# EAGLE board Ffrydiau_Panel (EAGLE 9.6.2)
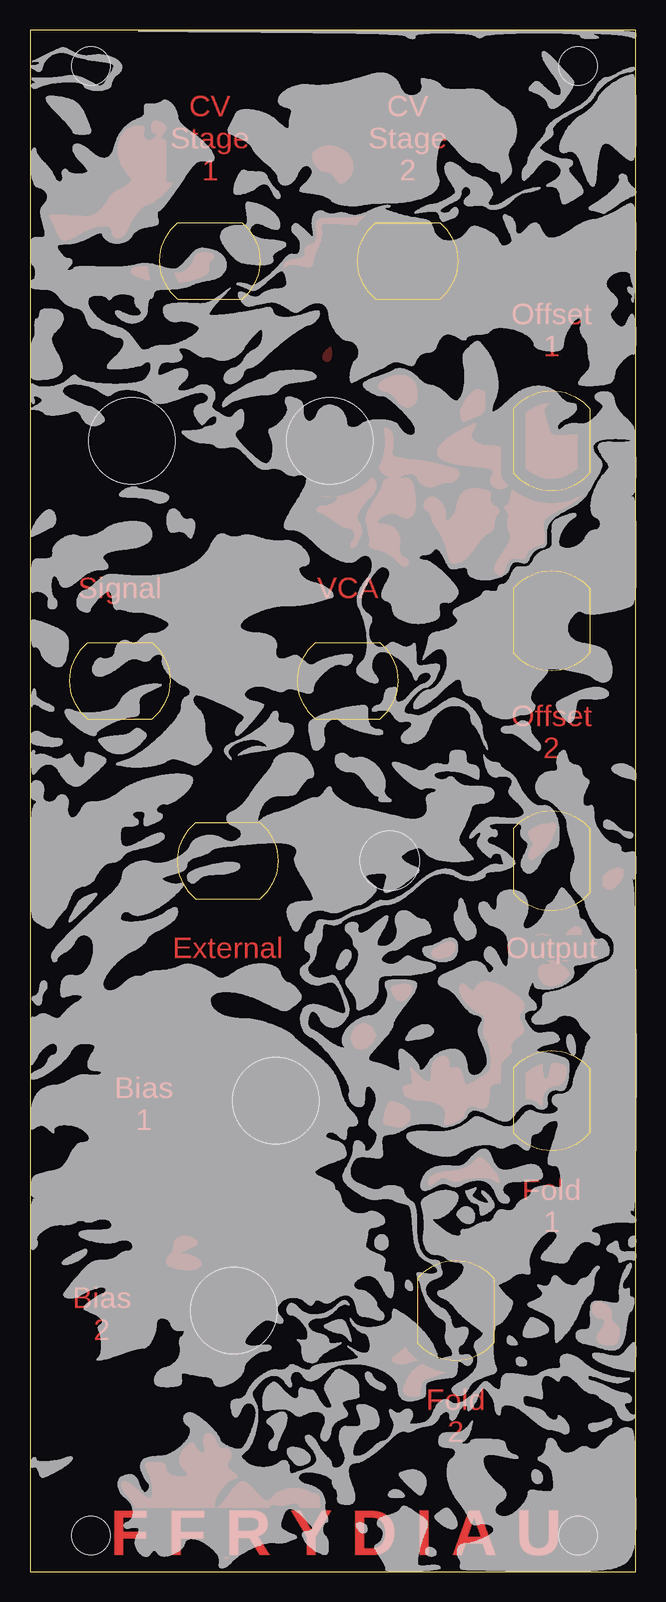
[diagram p0: board, top side]

Size 50.5 x 128.5 mm. Coordinates in mm from the lower left corner, seen from the top.
Outline: 0,0 50.5,0 50.5,128.5 0,128.5 0,0
Copper layers (1*16): Top 0.035mm / dielectric 1.5mm / Bottom 0.035mm
Design rules "default": minimum track width 6mil, minimum drill 0.35mm, track to track 6mil, track to pad 6mil, pad to pad 6mil, via to via 6mil, smd to smd 6mil, copper to edge 40mil, drill to drill 6mil, minimum pad ring 10mil, minimum via ring 8mil, stop-mask expansion 4mil, vias tented up to drill 0mil, thermal gap 10mil
Holes 3.2 mm at 5.08,3 5.08,125.5 45.72,3 45.72,125.5

## Footprints (pad centres in the part's own frame; a part is rotated, then mirrored left to right if it is on the bottom)
ALPHA9MM_POT_CUTOUT = hole 7.2: 0,0
DW1_SWITCH_CUTOUT = hole 4.95: 0,0

## Placement (x,y rotation side)
E$1  [CINCH_BANANA_CUTOUT]  15,109.25 90 top
E$2  [CINCH_BANANA_CUTOUT]  31.5,109.25 90 top
E$3  [CINCH_BANANA_CUTOUT]  43.5,94.25 0 top
E$4  [CINCH_BANANA_CUTOUT]  43.5,79.25 0 top
E$5  [CINCH_BANANA_CUTOUT]  7.5,74.25 90 top
E$6  [CINCH_BANANA_CUTOUT]  26.5,74.25 90 top
E$7  [CINCH_BANANA_CUTOUT]  16.5,59.25 90 top
E$8  [CINCH_BANANA_CUTOUT]  43.5,59.25 0 top
E$9  [CINCH_BANANA_CUTOUT]  43.5,39.25 0 top
E$10  [CINCH_BANANA_CUTOUT]  35.5,21.75 0 top
E$11  [ALPHA9MM_POT_CUTOUT]  25,94.25 0 top
E$12  [ALPHA9MM_POT_CUTOUT]  8.5,94.25 0 top
E$13  [ALPHA9MM_POT_CUTOUT]  20.5,39.25 0 top
E$14  [ALPHA9MM_POT_CUTOUT]  17,21.75 0 top
E$15  [DW1_SWITCH_CUTOUT]  30,59.25 0 top

## Library data of the parts
E$1-E$15 = ElectricNoodleBox

## Tracks (layer width: path | path; a pad name or v marks a point on that pad's centre or on a via)
S$1
  pour Top: 25.17,101.54 25.17,101.69 25.16,101.8 25.16,101.85 25.15,101.9 25.14,101.95 25.12,102 25.07,102.03 25.02,102.03 24.97,102.01 24.93,101.98 24.89,101.95 24.8,101.89 24.76,101.86 24.73,101.82 24.69,101.78 24.65,101.74 24.62,101.7 24.56,101.62 24.53,101.57 24.51,101.52 24.48,101.48 24.46,101.43 24.45,101.38 24.43,101.33 24.42,101.28 24.42,101.23 24.42,101.17 24.43,101.12 24.45,101.07 24.48,101.03 24.51,100.99 24.55,100.96 24.6,100.93 24.64,100.9 24.69,100.89 24.75,100.88 24.8,100.88 24.85,100.88 24.9,100.89 24.95,100.92 24.99,100.95 25.03,100.99 25.06,101.03 25.09,101.07 25.11,101.12 25.12,101.17 25.14,101.22 25.15,101.27 25.16,101.33 25.17,101.43
S$2
  pour Top: 26.54,116.11 26.61,116.19 26.64,116.23 26.71,116.31 26.74,116.35 26.8,116.44 26.82,116.49 26.87,116.58 26.89,116.63 26.93,116.73 26.94,116.78 26.96,116.83 26.97,116.88 26.98,116.93 26.98,116.99 26.99,117.04 26.99,117.09 26.99,117.14 26.98,117.2 26.98,117.25 26.97,117.3 26.95,117.41 26.94,117.46 26.9,117.56 26.89,117.61 26.84,117.7 26.82,117.75 26.77,117.84 26.74,117.89 26.68,117.97 26.61,118.06 26.54,118.14 26.51,118.17 26.43,118.25 26.35,118.32 26.27,118.38 26.23,118.42 26.14,118.48 26.05,118.53 25.96,118.58 25.86,118.63 25.77,118.67 25.67,118.71 25.62,118.73 25.52,118.76 25.41,118.79 25.31,118.81 25.26,118.82 25.15,118.83 25.05,118.84 25,118.84 24.89,118.84 24.78,118.83 24.68,118.82 24.57,118.8 24.52,118.79 24.42,118.76 24.37,118.75 24.27,118.71 24.17,118.67 24.13,118.65 24.03,118.6 23.94,118.54 23.86,118.48 23.77,118.42 23.69,118.35 23.66,118.31 23.62,118.27 23.6,118.22 23.58,118.17 23.56,118.12 23.55,118.07 23.54,118.02 23.54,117.97 23.54,117.91 23.54,117.86 23.55,117.81 23.56,117.76 23.58,117.71 23.59,117.66 23.61,117.61 23.65,117.51 23.7,117.41 23.75,117.32 23.81,117.24 23.88,117.15 23.95,117.08 24.03,117 24.11,116.93 24.19,116.87 24.24,116.85 24.28,116.82 24.33,116.8 24.38,116.78 24.43,116.76 24.48,116.74 24.53,116.73 24.59,116.72 24.64,116.72 24.69,116.72 24.74,116.71 24.8,116.7 24.85,116.69 24.9,116.67 24.94,116.65 24.99,116.63 25.04,116.6 25.08,116.57 25.13,116.54 25.17,116.51 25.21,116.48 25.25,116.44 25.29,116.4 25.32,116.37 25.35,116.32 25.38,116.28 25.41,116.24 25.49,116.1 25.55,116.01 25.58,115.97 25.61,115.92 25.64,115.88 25.68,115.85 25.72,115.81 25.77,115.78 25.81,115.76 25.86,115.75 25.92,115.74 25.97,115.74 26.02,115.75 26.07,115.76 26.12,115.78 26.17,115.81 26.21,115.84 26.3,115.9 26.34,115.93 26.42,116
S$3
  pour Top: 463 corners
S$4
  pour Top: 14,107.81 14.2,107.89 14.35,107.96 14.49,108.02 14.58,108.07 14.63,108.1 14.72,108.16 14.76,108.19 14.8,108.23 14.84,108.26 14.87,108.3 14.9,108.35 14.93,108.39 14.94,108.44 14.95,108.5 14.95,108.55 14.95,108.6 14.92,108.71 14.92,108.76 14.91,108.81 14.91,108.86 14.91,108.92 14.92,108.97 14.93,109.02 14.94,109.07 14.96,109.12 14.98,109.17 15.01,109.21 15.05,109.25 15.09,109.29 15.13,109.32 15.18,109.35 15.22,109.38 15.26,109.41 15.29,109.45 15.32,109.5 15.35,109.54 15.36,109.59 15.36,109.65 15.34,109.7 15.31,109.74 15.27,109.78 15.23,109.81 15.18,109.83 15.14,109.85 15.08,109.87 15.03,109.88 14.93,109.9 14.88,109.91 14.77,109.92 14.67,109.93 14.56,109.93 14.45,109.92 14.35,109.91 14.24,109.9 14.19,109.89 14.14,109.87 14.09,109.86 14.04,109.84 13.99,109.82 13.95,109.79 13.9,109.77 13.86,109.73 13.82,109.7 13.78,109.66 13.75,109.62 13.72,109.57 13.7,109.53 13.64,109.38 13.58,109.23 13.54,109.14 13.49,109.04 13.44,108.95 13.41,108.9 13.35,108.81 13.29,108.73 13.22,108.65 13.15,108.57 13.07,108.5 13.03,108.47 12.98,108.44 12.94,108.41 12.89,108.38 12.85,108.36 12.8,108.33 12.75,108.31 12.65,108.28 12.55,108.25 12.5,108.24 12.39,108.23 12.28,108.22 12.18,108.21 12.07,108.22 11.97,108.23 11.86,108.24 11.76,108.25 11.65,108.27 11.5,108.31 11.4,108.33 11.24,108.38 11.14,108.41 10.99,108.46 10.59,108.6 10.49,108.63 10.34,108.67 10.18,108.71 10.08,108.73 9.97,108.74 9.81,108.76 9.71,108.77 9.6,108.77 9.44,108.77 9.34,108.77 9.23,108.76 9.13,108.75 9.02,108.74 8.92,108.72 8.81,108.7 8.76,108.69 8.71,108.67 8.66,108.65 8.61,108.63 8.57,108.61 8.52,108.58 8.48,108.55 8.44,108.51 8.42,108.46 8.41,108.41 8.42,108.36 8.44,108.31 8.48,108.27 8.51,108.23 8.56,108.2 8.6,108.16 8.64,108.14 8.69,108.11 8.78,108.06 8.88,108.01 8.97,107.97 9.07,107.92 9.17,107.88 9.27,107.85 9.42,107.8 9.62,107.73 9.82,107.68 10.03,107.63 10.24,107.59 10.45,107.55 10.66,107.52 10.87,107.5 11.08,107.48 11.29,107.47 11.5,107.46 11.71,107.45 11.93,107.46 12.14,107.46 12.35,107.48 12.56,107.49 12.77,107.52 12.98,107.55 13.19,107.59 13.34,107.62 13.55,107.67 13.7,107.71 13.85,107.76
S$5
  pour Top: 227 corners
S$6
  pour Top: 848 corners
S$7
  pour Top: 280 corners
S$8
  pour Top: 211 corners
S$9
  pour Top: 476 corners
S$10
  pour Top: 37.09,96.23 37.23,96.29 37.33,96.33 37.42,96.38 37.52,96.43 37.61,96.48 37.65,96.51 37.69,96.54 37.73,96.58 37.77,96.61 37.81,96.65 37.84,96.69 37.87,96.74 37.9,96.79 37.92,96.83 37.94,96.88 37.95,96.93 37.96,96.99 37.98,97.09 37.99,97.2 37.99,97.35 38,97.57 37.99,97.78 37.98,97.94 37.97,98.1 37.95,98.2 37.94,98.25 37.93,98.3 37.91,98.35 37.86,98.36 37.81,98.38 37.7,98.4 37.55,98.45 37.4,98.51 37.35,98.51 37.3,98.51 37.25,98.5 37.19,98.49 37.15,98.47 37.1,98.45 37.05,98.42 37.01,98.39 36.96,98.36 36.92,98.33 36.84,98.26 36.8,98.23 36.72,98.16 36.61,98.04 36.55,97.96 36.48,97.88 36.38,97.75 36.32,97.66 36.27,97.57 36.21,97.48 36.16,97.39 36.09,97.25 36.04,97.15 36,97.05 35.96,96.96 35.95,96.91 35.92,96.8 35.91,96.75 35.9,96.7 35.89,96.65 35.89,96.59 35.88,96.54 35.89,96.49 35.89,96.44 35.9,96.38 35.97,96.13 35.98,96.08 36,96.03 36.02,95.98 36.05,95.93 36.09,95.9 36.14,95.89 36.2,95.89 36.25,95.9 36.3,95.91 36.35,95.93 36.45,95.96 36.55,96 37.09,96.23
S$11
  pour Top: 32.32,98.08 32.32,98.24 32.31,98.35 32.31,98.4 32.29,98.5 32.28,98.56 32.26,98.66 32.23,98.76 32.21,98.81 32.17,98.91 32.13,99.01 32.1,99.05 32.05,99.14 32.01,99.18 31.95,99.27 31.91,99.3 31.87,99.34 31.83,99.38 31.79,99.41 31.75,99.44 31.71,99.47 31.62,99.53 31.52,99.58 31.42,99.61 31.37,99.63 31.27,99.66 31.22,99.67 31.12,99.69 31.06,99.69 30.96,99.7 30.85,99.7 30.8,99.7 30.75,99.7 30.64,99.69 30.59,99.69 30.48,99.67 30.38,99.65 30.28,99.63 30.12,99.58 30.02,99.55 29.92,99.52 29.78,99.46 29.68,99.41 29.63,99.39 29.54,99.34 29.49,99.31 29.41,99.25 29.36,99.22 29.32,99.18 29.28,99.15 29.24,99.11 29.21,99.07 29.17,99.03 29.14,98.99 29.12,98.94 29.1,98.9 29.08,98.85 29.07,98.79 29.08,98.74 29.09,98.69 29.12,98.64 29.15,98.6 29.19,98.56 29.23,98.53 29.28,98.51 29.32,98.48 29.37,98.47 29.42,98.45 29.48,98.44 29.53,98.42 29.63,98.41 29.68,98.39 29.73,98.38 29.78,98.36 29.83,98.34 29.93,98.29 29.97,98.27 30.06,98.21 30.15,98.15 30.23,98.08 30.31,98.01 30.39,97.94 30.46,97.86 30.49,97.82 30.55,97.73 30.61,97.65 30.64,97.6 30.71,97.52 30.78,97.44 30.86,97.37 30.94,97.3 30.98,97.27 31.02,97.24 31.07,97.21 31.12,97.19 31.16,97.16 31.21,97.14 31.26,97.12 31.31,97.11 31.36,97.1 31.42,97.09 31.47,97.08 31.52,97.08 31.58,97.08 31.63,97.09 31.68,97.1 31.73,97.11 31.78,97.13 31.83,97.15 31.88,97.17 31.92,97.2 31.97,97.23 32.01,97.26 32.04,97.3 32.08,97.34 32.11,97.38 32.14,97.43 32.17,97.47 32.19,97.52 32.22,97.57 32.24,97.62 32.25,97.67 32.27,97.72 32.29,97.82 32.31,97.92 32.31,97.98
S$12
  pour Top: 43.87,61.92 43.9,62.07 43.91,62.18 43.91,62.28 43.91,62.39 43.91,62.49 43.9,62.6 43.88,62.7 43.85,62.81 43.83,62.86 43.81,62.9 43.79,62.95 43.77,63 43.74,63.05 43.72,63.09 43.69,63.13 43.65,63.18 43.62,63.21 43.58,63.25 43.54,63.29 43.5,63.32 43.46,63.35 43.41,63.38 43.36,63.4 43.32,63.42 43.27,63.44 43.22,63.46 43.17,63.48 43.12,63.49 43.06,63.5 43.01,63.51 42.91,63.52 42.8,63.52 42.75,63.52 42.64,63.51 42.54,63.49 42.49,63.49 42.44,63.47 42.38,63.46 42.34,63.44 42.29,63.42 42.24,63.39 42.2,63.36 42.16,63.33 42.12,63.3 42.08,63.26 42.04,63.22 42,63.18 41.94,63.1 41.91,63.06 41.85,62.97 41.8,62.88 41.77,62.83 41.75,62.78 41.71,62.69 41.67,62.59 41.65,62.54 41.62,62.44 41.61,62.39 41.58,62.28 41.56,62.18 41.55,62.13 41.54,62.02 41.53,61.92 41.53,61.81 41.53,61.71 41.54,61.65 41.55,61.55 41.56,61.5 41.58,61.4 41.6,61.34 41.61,61.29 41.63,61.25 41.66,61.2 41.68,61.15 41.71,61.1 41.73,61.06 41.83,60.93 41.86,60.89 41.89,60.85 41.91,60.8 41.93,60.75 41.95,60.7 41.95,60.65 41.95,60.6 41.94,60.54 41.92,60.49 41.9,60.45 41.87,60.4 41.84,60.36 41.81,60.32 41.75,60.23 41.72,60.19 41.69,60.14 41.67,60.1 41.65,60.05 41.63,60 41.61,59.95 41.6,59.9 41.59,59.84 41.58,59.79 41.58,59.74 41.58,59.69 41.58,59.63 41.59,59.58 41.6,59.53 41.62,59.48 41.64,59.43 41.68,59.39 41.72,59.37 41.77,59.36 41.83,59.36 41.88,59.37 41.93,59.38 41.98,59.4 42.03,59.42 42.07,59.45 42.16,59.5 42.25,59.56 42.33,59.63 42.41,59.7 42.53,59.8 42.61,59.88 42.72,59.99 42.79,60.07 42.89,60.19 43,60.31 43.1,60.43 43.19,60.56 43.25,60.64 43.31,60.73 43.4,60.86 43.48,61 43.54,61.09 43.61,61.23 43.66,61.32 43.71,61.42 43.75,61.51 43.79,61.61 43.82,61.71 43.85,61.81 43.87,61.92
S$13
  pour Top: 49.28,57.62 49.4,57.79 49.49,57.92 49.55,58.01 49.6,58.1 49.63,58.15 49.65,58.2 49.66,58.25 49.67,58.3 49.67,58.35 49.65,58.4 49.62,58.44 49.57,58.47 49.53,58.5 49.48,58.52 49.43,58.54 49.38,58.56 49.33,58.57 49.28,58.58 49.22,58.59 49.17,58.59 49.12,58.6 49.07,58.6 49.01,58.6 48.91,58.58 48.81,58.56 48.75,58.55 48.65,58.52 48.55,58.48 48.51,58.46 48.41,58.42 48.36,58.39 48.27,58.34 48.18,58.28 48.1,58.22 48.06,58.19 47.98,58.12 47.9,58.04 47.87,58.01 47.8,57.92 47.77,57.88 47.74,57.84 47.71,57.79 47.69,57.75 47.66,57.7 47.64,57.65 47.63,57.6 47.62,57.55 47.61,57.5 47.61,57.44 47.62,57.39 47.63,57.34 47.65,57.29 47.67,57.24 47.71,57.2 47.74,57.16 47.78,57.13 47.83,57.1 47.92,57.04 48.01,56.99 48.06,56.97 48.1,56.95 48.15,56.93 48.2,56.92 48.26,56.9 48.31,56.89 48.36,56.89 48.41,56.89 48.47,56.9 48.52,56.91 48.57,56.93 48.61,56.95 48.66,56.98 48.71,57.01 48.75,57.04 48.83,57.1 48.87,57.14 48.94,57.22 49.05,57.33 49.15,57.46
S$14
  pour Top: 46.32,51.25 46.43,51.28 46.48,51.29 46.58,51.32 46.63,51.34 46.68,51.37 46.72,51.39 46.77,51.42 46.81,51.45 46.85,51.48 46.89,51.52 46.93,51.56 46.96,51.6 46.99,51.64 47.01,51.69 47.03,51.74 47.04,51.79 47.04,51.85 47.03,51.9 47.01,51.95 46.98,52 46.95,52.04 46.92,52.08 46.88,52.11 46.83,52.14 46.79,52.17 46.74,52.2 46.69,52.22 46.64,52.24 46.59,52.25 46.49,52.28 46.44,52.3 46.39,52.32 46.35,52.35 46.31,52.38 46.26,52.41 46.23,52.45 46.19,52.49 46.16,52.54 46.13,52.58 46.11,52.63 46.09,52.68 46.08,52.73 46.06,52.78 46.05,52.83 46.05,52.88 46.04,52.94 46.04,53.1 46.03,53.2 46.01,53.31 46,53.36 45.99,53.41 45.97,53.46 45.95,53.51 45.92,53.55 45.9,53.6 45.86,53.64 45.82,53.67 45.78,53.7 45.73,53.73 45.68,53.74 45.63,53.75 45.57,53.75 45.52,53.74 45.47,53.73 45.42,53.71 45.37,53.69 45.32,53.67 45.27,53.64 45.19,53.59 45.1,53.52 45.06,53.49 44.98,53.42 44.9,53.34 44.87,53.31 44.8,53.22 44.77,53.18 44.74,53.14 44.71,53.09 44.69,53.04 44.67,52.99 44.65,52.95 44.63,52.89 44.62,52.84 44.61,52.79 44.6,52.74 44.6,52.69 44.6,52.63 44.6,52.58 44.6,52.47 44.62,52.37 44.65,52.21 44.65,52.16 44.66,52.05 44.67,52 44.67,51.9 44.67,51.84 44.66,51.79 44.65,51.74 44.65,51.68 44.63,51.63 44.62,51.58 44.59,51.53 44.57,51.49 44.53,51.45 44.48,51.43 44.44,51.39 44.4,51.36 44.36,51.32 44.33,51.28 44.3,51.24 44.27,51.19 44.26,51.14 44.26,51.09 44.28,51.04 44.32,51 44.36,50.97 44.41,50.94 44.46,50.92 44.51,50.91 44.56,50.9 44.61,50.9 44.67,50.9 44.72,50.9 44.77,50.91 44.88,50.93 45.24,51.01 45.6,51.1 45.96,51.18
S$15
  pour Top: 43.29,51.72 43.43,51.79 43.52,51.85 43.61,51.91 43.69,51.97 43.77,52.04 43.81,52.08 43.85,52.12 43.88,52.16 43.91,52.2 43.94,52.25 43.97,52.29 43.99,52.34 44.01,52.39 44.01,52.44 44.02,52.5 44.01,52.55 44,52.6 43.98,52.65 43.95,52.69 43.92,52.74 43.88,52.78 43.84,52.81 43.8,52.84 43.75,52.87 43.71,52.9 43.66,52.92 43.61,52.94 43.51,52.98 43.41,53.01 43.31,53.03 43.15,53.06 42.99,53.08 42.83,53.09 42.72,53.09 42.62,53.09 42.51,53.09 42.46,53.09 42.41,53.08 42.35,53.07 42.3,53.06 42.25,53.04 42.21,53.02 42.16,52.98 42.13,52.94 42.1,52.9 42.08,52.85 42.07,52.8 42.05,52.75 42.04,52.64 42.03,52.54 42.02,52.38 42.02,52.22 42.02,52.06 42.03,51.9 42.04,51.79 42.06,51.69 42.07,51.64 42.08,51.59 42.1,51.54 42.13,51.49 42.16,51.45 42.2,51.41 42.25,51.39 42.3,51.37 42.35,51.37 42.4,51.37 42.46,51.38 42.51,51.39 42.56,51.4 42.66,51.43 42.71,51.45 42.81,51.49 42.91,51.53 43,51.57 43.15,51.64
S$16
  pour Top: 44.6,49.33 44.75,49.47 44.86,49.58 44.9,49.62 44.93,49.66 44.96,49.71 44.99,49.75 45.01,49.8 45.01,49.86 45,49.91 44.97,49.95 44.94,50 44.91,50.04 44.88,50.08 44.8,50.16 44.61,50.34 44.57,50.37 44.49,50.44 44.36,50.53 44.27,50.59 44.18,50.65 44.09,50.7 44,50.75 43.9,50.8 43.81,50.84 43.71,50.89 43.61,50.92 43.51,50.95 43.36,50.99 43.25,51.01 43.2,51.02 43.15,51.03 43.1,51.01 43.13,50.97 43.17,50.93 43.21,50.9 43.34,50.8 43.38,50.77 43.42,50.74 43.46,50.7 43.48,50.65 43.45,50.62 43.4,50.6 43.35,50.59 43.3,50.59 43.19,50.58 43.03,50.58 42.93,50.57 42.82,50.56 42.77,50.55 42.72,50.54 42.67,50.52 42.62,50.5 42.57,50.47 42.53,50.45 42.49,50.41 42.45,50.37 42.43,50.33 42.4,50.28 42.39,50.23 42.38,50.18 42.37,50.12 42.37,50.07 42.37,50.02 42.38,49.96 42.39,49.91 42.41,49.81 42.42,49.76 42.45,49.65 42.5,49.5 42.54,49.41 42.56,49.36 42.59,49.31 42.61,49.27 42.64,49.22 42.68,49.18 42.71,49.14 42.75,49.1 42.78,49.06 42.82,49.03 42.87,49 42.91,48.97 42.96,48.94 43,48.92 43.05,48.89 43.1,48.88 43.15,48.86 43.2,48.85 43.25,48.83 43.31,48.83 43.36,48.82 43.41,48.82 43.46,48.82 43.52,48.82 43.62,48.83 43.73,48.85 43.83,48.87 43.93,48.9 44.03,48.94 44.12,48.99 44.22,49.04 44.31,49.1 44.39,49.16 44.48,49.22 44.52,49.26 44.6,49.33
S$17
  pour Top: 35.32,51.64 35.38,51.73 35.4,51.78 35.42,51.83 35.44,51.88 35.46,51.93 35.47,51.98 35.48,52.03 35.48,52.08 35.48,52.14 35.47,52.19 35.45,52.24 35.43,52.29 35.4,52.33 35.36,52.36 35.31,52.39 35.26,52.41 35.21,52.43 35.16,52.44 35.11,52.45 35.06,52.45 35,52.45 34.95,52.45 34.9,52.45 34.79,52.43 34.69,52.4 34.64,52.39 34.54,52.36 34.44,52.32 34.3,52.25 34.11,52.15 33.97,52.07 33.84,51.99 33.75,51.93 33.67,51.86 33.63,51.82 33.59,51.79 33.56,51.74 33.53,51.7 33.5,51.65 33.49,51.6 33.48,51.55 33.49,51.5 33.5,51.45 33.52,51.4 33.55,51.35 33.58,51.31 33.62,51.27 33.65,51.23 33.7,51.2 33.74,51.17 33.79,51.15 33.84,51.13 33.89,51.12 33.94,51.11 34,51.11 34.05,51.1 34.16,51.1 34.21,51.11 34.31,51.12 34.42,51.14 34.52,51.16 34.62,51.19 34.72,51.22 34.82,51.26 34.87,51.28 34.97,51.33 35.01,51.36 35.1,51.42 35.14,51.45 35.18,51.48 35.22,51.52 35.26,51.56 35.29,51.6
S$18
  pour Top: 839 corners
S$19
  pour Top: 31.67,48.09 31.72,48.18 31.75,48.23 31.79,48.33 31.81,48.38 31.83,48.43 31.84,48.48 31.85,48.53 31.86,48.58 31.85,48.63 31.84,48.68 31.82,48.73 31.79,48.78 31.76,48.81 31.71,48.84 31.67,48.87 31.62,48.89 31.57,48.9 31.52,48.91 31.46,48.92 31.36,48.93 31.25,48.93 31.15,48.93 30.99,48.92 30.83,48.9 30.68,48.87 30.52,48.85 30.42,48.82 30.32,48.8 30.27,48.78 30.22,48.75 30.18,48.72 30.14,48.68 30.12,48.64 30.12,48.58 30.12,48.53 30.13,48.48 30.15,48.43 30.18,48.33 30.25,48.19 30.29,48.09 30.34,48 30.4,47.91 30.43,47.87 30.47,47.83 30.5,47.79 30.54,47.75 30.58,47.72 30.63,47.69 30.67,47.66 30.72,47.64 30.77,47.62 30.82,47.6 30.87,47.59 30.92,47.58 30.97,47.58 31.03,47.59 31.08,47.6 31.13,47.61 31.18,47.63 31.23,47.65 31.27,47.68 31.32,47.71 31.36,47.74 31.4,47.77 31.44,47.81 31.48,47.84 31.51,47.88 31.58,47.96 31.61,48.01
S$20
  pour Top: 28.82,44.53 28.83,44.58 28.84,44.63 28.84,44.68 28.83,44.74 28.82,44.79 28.81,44.84 28.79,44.89 28.77,44.94 28.75,44.99 28.7,45.08 28.64,45.17 28.58,45.26 28.55,45.3 28.47,45.37 28.44,45.41 28.4,45.44 28.35,45.48 28.31,45.51 28.27,45.54 28.22,45.56 28.17,45.58 28.12,45.6 28.07,45.62 28.02,45.63 27.97,45.64 27.91,45.65 27.86,45.65 27.81,45.65 27.76,45.64 27.7,45.64 27.65,45.63 27.6,45.61 27.55,45.6 27.5,45.58 27.45,45.55 27.41,45.53 27.36,45.5 27.32,45.47 27.27,45.44 27.23,45.41 27.19,45.38 27.15,45.34 27.12,45.3 27.08,45.26 27.01,45.18 26.98,45.13 26.93,45.04 26.91,45 26.88,44.95 26.86,44.9 26.84,44.85 26.83,44.8 26.81,44.75 26.8,44.7 26.79,44.64 26.79,44.59 26.78,44.54 26.78,44.49 26.78,44.43 26.79,44.38 26.8,44.33 26.8,44.27 26.82,44.22 26.83,44.17 26.85,44.12 26.87,44.07 26.89,44.03 26.92,43.98 26.95,43.93 26.98,43.89 27.01,43.85 27.04,43.81 27.08,43.77 27.11,43.73 27.15,43.7 27.2,43.67 27.24,43.64 27.29,43.61 27.34,43.59 27.39,43.58 27.44,43.57 27.49,43.56 27.55,43.55 27.6,43.55 27.65,43.55 27.71,43.56 27.76,43.57 27.81,43.58 27.86,43.59 27.91,43.61 27.96,43.63 28.01,43.65 28.06,43.67 28.15,43.72 28.24,43.78 28.32,43.85 28.4,43.92 28.48,43.99 28.55,44.07 28.61,44.16 28.67,44.24 28.72,44.34 28.77,44.43
S$21
  pour Top: 14.25,25.47 14.28,25.52 14.29,25.57 14.3,25.62 14.29,25.67 14.28,25.72 14.26,25.77 14.23,25.82 14.2,25.86 14.17,25.9 14.13,25.94 14.09,25.98 14.05,26.02 13.97,26.08 13.93,26.11 13.84,26.17 13.75,26.22 13.7,26.24 13.6,26.29 13.5,26.32 13.45,26.34 13.4,26.36 13.3,26.39 13.2,26.41 13.15,26.42 13.04,26.43 12.93,26.44 12.67,26.45 12.62,26.45 12.56,26.46 12.51,26.47 12.49,26.51 12.52,26.55 12.56,26.58 12.65,26.63 12.75,26.68 12.89,26.75 13.37,26.97 13.56,27.06 13.71,27.14 13.8,27.19 13.84,27.22 13.88,27.25 13.92,27.29 13.95,27.33 13.97,27.38 13.96,27.43 13.94,27.48 13.91,27.52 13.88,27.56 13.84,27.6 13.76,27.67 13.71,27.7 13.67,27.73 13.63,27.76 13.58,27.79 13.49,27.83 13.39,27.87 13.29,27.9 13.18,27.93 13.13,27.94 13.03,27.95 12.92,27.95 12.87,27.95 12.76,27.94 12.66,27.92 12.61,27.91 12.55,27.89 12.5,27.87 12.46,27.85 12.41,27.83 12.36,27.81 12.31,27.78 12.27,27.75 12.23,27.72 12.19,27.69 12.15,27.65 12.12,27.61 12.08,27.57 12.06,27.52 12.03,27.47 12.01,27.43 11.99,27.38 11.98,27.32 11.97,27.27 11.97,27.22 11.96,27.11 11.96,27.06 11.95,27.01 11.94,26.9 11.91,26.8 11.9,26.75 11.86,26.65 11.84,26.6 11.81,26.55 11.79,26.51 11.76,26.47 11.73,26.42 11.69,26.39 11.6,26.32 11.56,26.29 11.53,26.25 11.49,26.21 11.46,26.17 11.43,26.12 11.41,26.08 11.39,26.03 11.37,25.98 11.35,25.93 11.34,25.88 11.34,25.82 11.34,25.77 11.36,25.72 11.38,25.67 11.42,25.63 11.45,25.59 11.49,25.56 11.54,25.53 11.58,25.5 11.63,25.47 11.72,25.43 11.82,25.38 11.92,25.35 12.02,25.32 12.12,25.29 12.23,25.26 12.33,25.24 12.49,25.21 12.59,25.2 12.75,25.18 12.85,25.17 12.96,25.16 13.12,25.16 13.22,25.16 13.33,25.16 13.44,25.17 13.54,25.18 13.65,25.19 13.75,25.21 13.8,25.22 13.9,25.25 13.95,25.26 14,25.28 14.05,25.3 14.1,25.33 14.14,25.36 14.19,25.39 14.22,25.43 14.25,25.47
S$22
  pour Top: 31.41,37.3 31.48,37.38 31.51,37.42 31.54,37.46 31.57,37.5 31.6,37.55 31.63,37.6 31.65,37.64 31.67,37.69 31.69,37.74 31.7,37.79 31.71,37.84 31.72,37.9 31.72,37.95 31.73,38 31.72,38.06 31.72,38.11 31.71,38.16 31.69,38.21 31.68,38.26 31.66,38.31 31.64,38.36 31.61,38.4 31.58,38.45 31.55,38.49 31.52,38.53 31.49,38.57 31.45,38.61 31.41,38.65 31.33,38.72 31.25,38.78 31.2,38.81 31.11,38.86 31.01,38.91 30.92,38.95 30.72,39.02 30.57,39.07 30.46,39.09 30.41,39.1 30.36,39.11 30.31,39.12 30.26,39.12 30.2,39.13 30.15,39.12 30.1,39.11 30.05,39.1 30,39.08 29.95,39.05 29.91,39.02 29.87,38.98 29.84,38.94 29.81,38.9 29.78,38.85 29.76,38.81 29.72,38.71 29.68,38.61 29.63,38.46 29.61,38.36 29.59,38.25 29.54,38.05 29.51,37.89 29.5,37.79 29.49,37.68 29.48,37.63 29.48,37.58 29.49,37.52 29.5,37.47 29.52,37.42 29.54,37.37 29.58,37.33 29.62,37.3 29.66,37.27 29.71,37.25 29.76,37.23 29.81,37.22 29.91,37.19 30.28,37.13 30.54,37.08 30.69,37.06 30.8,37.05 30.85,37.05 30.9,37.05 30.96,37.05 31.01,37.06 31.06,37.07 31.11,37.08 31.16,37.1 31.21,37.13 31.25,37.16 31.29,37.19 31.33,37.23
S$23
  pour Top: 33.99,32.61 34.07,32.68 34.11,32.72 34.15,32.75 34.2,32.78 34.24,32.81 34.29,32.83 34.34,32.85 34.39,32.87 34.44,32.87 34.5,32.87 34.55,32.87 34.6,32.86 34.65,32.84 34.7,32.82 34.75,32.8 34.79,32.77 34.84,32.75 34.98,32.67 35.02,32.64 35.07,32.62 35.12,32.6 35.17,32.58 35.22,32.57 35.27,32.56 35.32,32.55 35.38,32.54 35.43,32.53 35.48,32.53 35.53,32.53 35.59,32.53 35.64,32.53 35.69,32.54 35.74,32.55 35.8,32.56 35.85,32.58 35.94,32.62 36.04,32.65 36.2,32.69 36.3,32.72 36.4,32.74 36.51,32.76 36.61,32.78 36.72,32.79 36.87,32.81 36.98,32.82 37.14,32.83 37.24,32.84 37.4,32.84 37.51,32.84 37.67,32.84 37.88,32.83 37.98,32.83 38.09,32.82 38.19,32.8 38.3,32.79 38.4,32.77 38.45,32.75 38.5,32.74 38.55,32.72 38.6,32.7 38.65,32.68 38.7,32.65 38.78,32.59 38.82,32.56 38.91,32.5 38.96,32.48 39.01,32.46 39.06,32.44 39.11,32.45 39.15,32.48 39.16,32.53 39.16,32.59 39.14,32.64 39.13,32.69 39.11,32.74 39.09,32.79 39.06,32.83 39.01,32.93 38.93,33.06 38.87,33.15 38.81,33.24 38.71,33.36 38.58,33.53 38.44,33.69 38.23,33.92 38.09,34.08 37.94,34.23 37.82,34.34 37.74,34.41 37.7,34.44 37.65,34.46 37.6,34.48 37.55,34.5 37.5,34.5 37.45,34.49 37.4,34.48 37.35,34.45 37.31,34.42 37.27,34.39 37.19,34.31 37.12,34.24 36.97,34.09 36.89,34.01 36.81,33.94 36.73,33.88 36.64,33.82 36.6,33.79 36.5,33.74 36.41,33.7 36.26,33.63 36.11,33.58 35.96,33.53 35.81,33.49 35.6,33.45 35.45,33.42 35.29,33.39 35.13,33.37 34.82,33.33 34.61,33.29 34.4,33.26 34.25,33.22 34.14,33.2 34.04,33.17 33.89,33.12 33.79,33.09 33.74,33.07 33.65,33.02 33.6,32.99 33.55,32.97 33.51,32.94 33.47,32.91 33.43,32.87 33.39,32.83 33.35,32.79 33.32,32.75 33.3,32.71 33.27,32.66 33.25,32.61 33.24,32.56 33.23,32.51 33.22,32.45 33.22,32.4 33.23,32.35 33.24,32.3 33.27,32.26 33.32,32.23 33.37,32.23 33.42,32.24 33.47,32.25 33.52,32.27 33.57,32.3 33.61,32.32 33.7,32.38 33.75,32.41 33.83,32.48 33.91,32.54
S$24
  pour Top: 808 corners
S$25
  pour Top: 32.67,15.28 32.66,15.38 32.66,15.44 32.65,15.49 32.65,15.54 32.66,15.59 32.66,15.65 32.68,15.7 32.7,15.75 32.72,15.79 32.75,15.84 32.79,15.88 32.82,15.91 32.87,15.95 32.91,15.97 32.96,16 33.05,16.05 33.15,16.09 33.29,16.15 33.39,16.19 33.54,16.24 34.05,16.4 34.25,16.47 34.4,16.53 34.54,16.58 34.59,16.61 34.64,16.63 34.69,16.66 34.72,16.69 34.74,16.74 34.73,16.79 34.69,16.83 34.64,16.86 34.6,16.89 34.51,16.94 34.37,17.01 34.27,17.05 34.17,17.1 34.07,17.14 33.97,17.17 33.87,17.2 33.72,17.25 33.62,17.27 33.51,17.29 33.41,17.3 33.36,17.3 33.25,17.31 33.2,17.31 33.09,17.3 33.04,17.3 32.93,17.28 32.88,17.27 32.78,17.25 32.73,17.23 32.63,17.2 32.53,17.16 32.48,17.13 32.44,17.11 32.34,17.05 32.3,17.03 32.21,16.96 32.13,16.9 32.09,16.86 32.01,16.79 31.94,16.71 31.9,16.68 31.8,16.55 31.71,16.42 31.62,16.29 31.52,16.11 31.41,15.92 31.37,15.83 31.32,15.73 31.26,15.59 31.22,15.49 31.2,15.44 31.17,15.34 31.16,15.28 31.15,15.23 31.15,15.18 31.15,15.13 31.15,15.07 31.16,15.02 31.17,14.97 31.19,14.92 31.21,14.87 31.24,14.83 31.28,14.79 31.32,14.76 31.37,14.73 31.41,14.71 31.46,14.69 31.51,14.67 31.56,14.66 31.62,14.65 31.72,14.63 31.83,14.62 31.93,14.62 32.09,14.62 32.2,14.62 32.3,14.63 32.36,14.63 32.41,14.64 32.46,14.65 32.51,14.67 32.56,14.69 32.6,14.72 32.64,14.76 32.66,14.8 32.68,14.86 32.69,14.91 32.69,14.96 32.69,15.01 32.69,15.12 32.67,15.28
S$26
  pour Top: 32.64,17.59 32.8,17.57 32.9,17.57 32.95,17.56 33.01,17.56 33.06,17.57 33.11,17.58 33.16,17.6 33.21,17.62 33.24,17.66 33.26,17.71 33.28,17.76 33.29,17.81 33.29,17.87 33.29,17.92 33.29,18.03 33.28,18.18 33.26,18.39 33.25,18.5 33.23,18.6 33.2,18.76 33.15,18.91 33.1,19.06 33.04,19.21 33,19.31 32.95,19.4 32.93,19.45 32.88,19.54 32.82,19.63 32.78,19.67 32.75,19.71 32.64,19.82 32.53,19.93 32.49,19.97 32.45,20 32.4,20.03 32.35,20.05 32.3,20.06 32.25,20.04 32.21,20.01 32.17,19.98 32.14,19.93 32.11,19.89 32.05,19.8 31.97,19.66 31.85,19.43 31.8,19.34 31.74,19.25 31.68,19.16 31.59,19.03 31.49,18.91 31.42,18.83 31.32,18.71 31.24,18.63 31.13,18.52 31.05,18.45 30.97,18.39 30.93,18.35 30.88,18.32 30.75,18.23 30.62,18.14 30.5,18.04 30.42,17.97 30.39,17.93 30.32,17.85 30.28,17.81 30.25,17.77 30.22,17.72 30.2,17.67 30.2,17.62 30.22,17.57 30.25,17.53 30.29,17.49 30.33,17.47 30.38,17.44 30.43,17.42 30.48,17.4 30.53,17.38 30.58,17.37 30.68,17.35 30.74,17.34 30.84,17.32 30.95,17.32 31,17.31 31.1,17.31 31.21,17.32 31.31,17.34 31.37,17.35 31.42,17.36 31.47,17.37 31.52,17.39 31.57,17.41 31.61,17.44 31.66,17.47 31.7,17.49 31.75,17.51 31.8,17.53 31.85,17.55 31.9,17.56 32.01,17.58 32.06,17.59 32.16,17.6 32.27,17.6 32.32,17.61 32.43,17.61 32.48,17.6 32.59,17.6 32.64,17.59
S$27
  pour Top: 49.14,19.58 49.16,19.69 49.17,19.79 49.18,19.9 49.18,19.95 49.18,20 49.17,20.06 49.16,20.11 49.15,20.16 49.14,20.21 49.12,20.26 49.1,20.31 49.08,20.36 49.05,20.4 49.02,20.45 48.98,20.49 48.95,20.52 48.91,20.56 48.83,20.63 48.79,20.66 48.75,20.7 48.71,20.74 48.68,20.78 48.65,20.83 48.62,20.87 48.6,20.92 48.57,20.96 48.55,21.01 48.53,21.06 48.52,21.11 48.51,21.16 48.5,21.22 48.5,21.27 48.52,21.37 48.52,21.43 48.52,21.48 48.52,21.53 48.51,21.59 48.5,21.64 48.48,21.69 48.46,21.74 48.44,21.78 48.42,21.83 48.39,21.88 48.36,21.92 48.33,21.96 48.29,22 48.26,22.04 48.22,22.08 48.14,22.15 48.06,22.21 47.97,22.27 47.88,22.32 47.78,22.36 47.73,22.38 47.68,22.4 47.63,22.41 47.57,22.42 47.52,22.43 47.47,22.43 47.42,22.44 47.36,22.43 47.31,22.43 47.26,22.42 47.21,22.4 47.16,22.38 47.11,22.36 47.07,22.33 47.03,22.29 46.99,22.26 46.96,22.22 46.93,22.17 46.91,22.12 46.89,22.07 46.88,22.02 46.87,21.97 46.87,21.92 46.87,21.86 46.88,21.81 46.89,21.76 46.9,21.71 46.92,21.66 46.94,21.61 46.96,21.56 46.98,21.51 47.01,21.46 47.03,21.42 47.07,21.38 47.1,21.34 47.14,21.3 47.17,21.26 47.22,21.23 47.26,21.2 47.31,21.18 47.36,21.16 47.41,21.16 47.52,21.15 47.57,21.15 47.62,21.14 47.67,21.12 47.72,21.11 47.77,21.08 47.81,21.05 47.85,21.01 47.88,20.97 47.9,20.92 47.91,20.87 47.91,20.81 47.91,20.76 47.9,20.71 47.88,20.66 47.87,20.61 47.85,20.56 47.8,20.46 47.75,20.37 47.7,20.28 47.64,20.19 47.51,20.02 47.45,19.94 47.42,19.89 47.37,19.8 47.35,19.75 47.32,19.7 47.31,19.65 47.29,19.6 47.28,19.55 47.27,19.5 47.27,19.45 47.27,19.39 47.28,19.34 47.29,19.29 47.32,19.24 47.34,19.2 47.38,19.16 47.42,19.12 47.46,19.09 47.5,19.06 47.55,19.03 47.59,19.01 47.64,18.99 47.69,18.97 47.8,18.94 47.9,18.92 48,18.91 48.11,18.9 48.22,18.89 48.37,18.89 48.48,18.9 48.59,18.91 48.64,18.92 48.69,18.93 48.74,18.94 48.79,18.96 48.84,18.99 48.88,19.02 48.92,19.05 48.95,19.09 48.99,19.14 49.01,19.18 49.04,19.23 49.06,19.28 49.08,19.33 49.11,19.43 49.12,19.48

## Text on the board
Top: CV / Stage / 1 | CV / Stage / 2 | Offset / 1 | Signal | VCA | Offset / 2 | External | Output | Bias / 1 | Fold / 1 | Bias / 2 | Fold / 2 | F F R Y D I A U
tStop: CV / Stage / 1 | CV / Stage / 2 | Offset / 1 | Signal | VCA | Offset / 2 | External | Output | Bias / 1 | Fold / 1 | Bias / 2 | Fold / 2 | F F R Y D I A U